# Allegro board TIMERASPIRAPOLVERE.brd
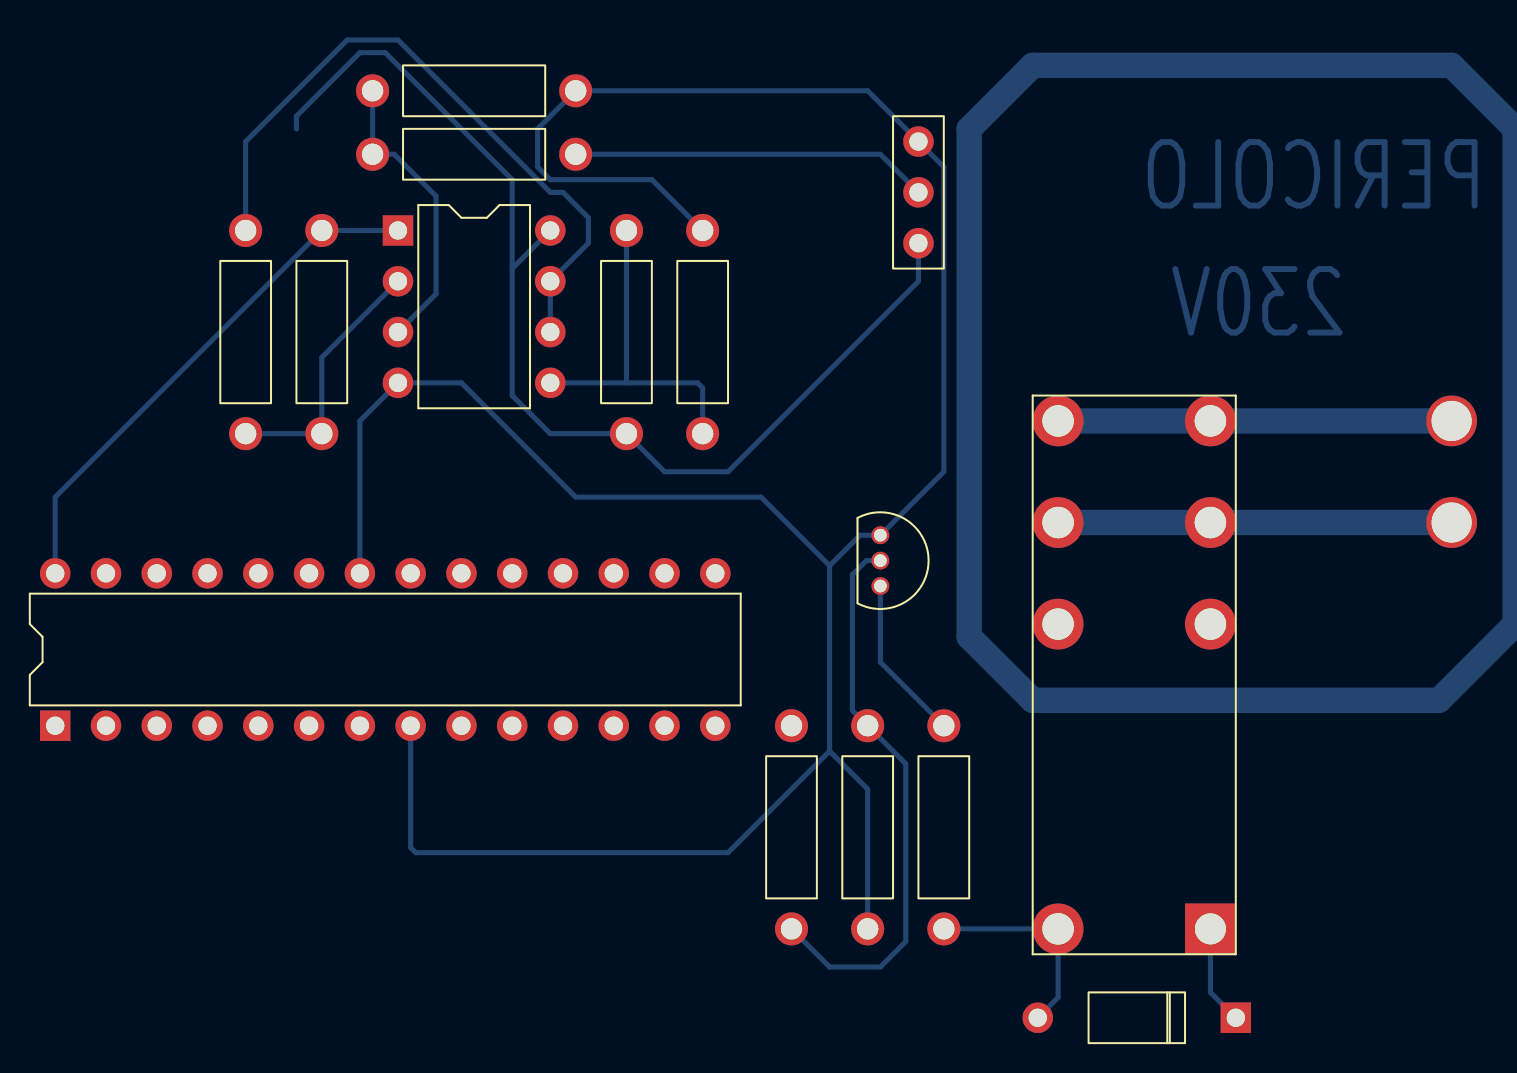
[diagram p0: board, top side]
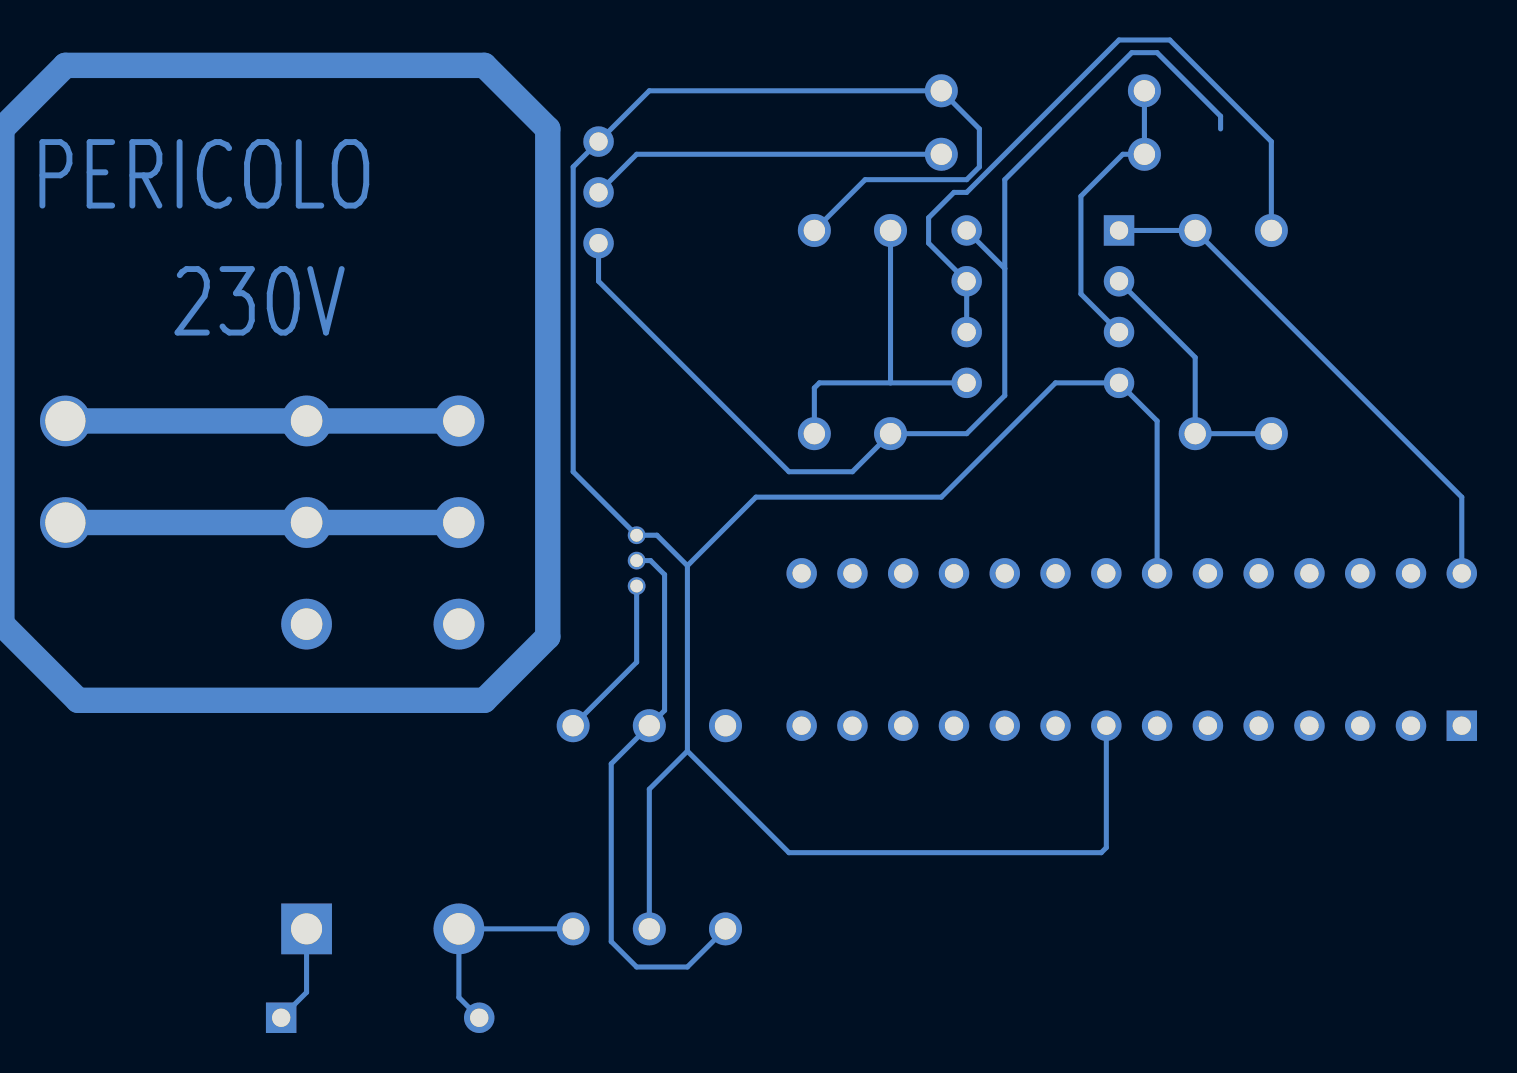
[diagram p1: board, bottom side, seen from below]

No outline. copper layers: TOP, BOTTOM. Coordinates in mm from the lowest, leftmost part position.

## Design rules (mm)
nets with their own width: min track width 1.27; nets N03801 N03830

## Placement (name value [footprint] x y rotation side)
D1  1N4148  [DO41]  59.06 0 90 top
J1  -  [ACS712]  43.18 38.73 270 top
J2  USCITA  [HEADER2]  69.85 24.77 90 top
K1  RELAY DPDT  [RELAY_DPDT]  57.79 4.45 180 top
Q1  2N2222  [TO92]  41.28 24.13 0 top
R1  1k  [RES400]  26.04 43.18 90 top
R2  47k  [RES400]  26.04 46.35 90 top
R3  1k  [RES400]  9.53 29.21 0 top
R4  47k  [RES400]  13.34 29.21 0 top
R5  1k  [RES400]  28.58 29.21 0 top
R6  1k  [RES400]  32.39 29.21 0 top
R7  RESISTOR  [RES400]  44.45 4.45 0 top
R8  220  [RES400]  36.83 14.61 180 top
R9  10k  [RES400]  40.64 4.45 0 top
U1  LM358  [DIP8_3]  17.15 39.37 0 top
U2  ATMega328P  [DIP28_3]  0 14.61 90 top

## Library data of the parts
D1 = DIODE
J1 = CON3: User Part Number: ***
J2 = CON2_0
K1 = RELAY DPDT
Q1 = 2N2222
R1-R9 = RESISTOR: Tolerance: ***; User Part Number: ***
U1 = LM358: Tolerance: ***; User Part Number: ***
U2 = ATMega328 DIP_0: Tolerance: ***; User Part Number: ***

## Footprints (pads in the part's own frame, mm; a bottom-side part is the same pattern mirrored in y, then rotated)
ACS712
  round 1.524 hole 0.914: 1(0,0) 2(-2.54,0) 3(-5.08,0)
DIP8_3
  rect 1.524x1.524 hole 0.914: 1(0,0)
  round 1.524 hole 0.914: 2(0,-2.54) 3(0,-5.08) 4(0,-7.62) 5(7.62,-7.62) 6(7.62,-5.08) 7(7.62,-2.54) 8(7.62,0)
DIP28_3
  rect 1.524x1.524 hole 0.914: 1(0,0)
  round 1.524 hole 0.914: 2(0,-2.54) 3(0,-5.08) 4(0,-7.62) 5(0,-10.16) 6(0,-12.7) 7(0,-15.24) 8(0,-17.78) 9(0,-20.32) 10(0,-22.86) 11(0,-25.4) 12(0,-27.94) 13(0,-30.48) 14(0,-33.02) 15(7.62,-33.02) 16(7.62,-30.48) 17(7.62,-27.94) 18(7.62,-25.4) 19(7.62,-22.86) 20(7.62,-20.32) 21(7.62,-17.78) 22(7.62,-15.24) 23(7.62,-12.7) 24(7.62,-10.16) 25(7.62,-7.62) 26(7.62,-5.08) 27(7.62,-2.54) 28(7.62,0)
DO41
  rect 1.524x1.524 hole 0.914: 1(0,0)
  round 1.524 hole 0.914: 2(0,9.906)
HEADER2
  round 2.54 hole 2.007: 1(0,0) 2(5.08,0)
RELAY_DPDT
  rect 2.54x2.54 hole 1.549: 1(0,0)
  round 2.54 hole 1.575: 2(7.62,0) 3(0,-20.32) 4(0,-15.24) 5(0,-25.4) 6(7.62,-20.32) 7(7.62,-25.4) 8(7.62,-15.24)
RES400
  round 1.651 hole 1.067: 1(0,0) 2(0,10.16)
TO92
  round 0.889 hole 0.635: 1(0,0) 2(0,-1.27) 3(0,-2.54)

## Nets
+5V: J1.1 R5.1 U1.8(VCC) U2.7(VCC) U2.20(AVCC)
+12V: D1.1(K) K1.1(COIL1)
GND: J1.3 Q1.1(EMITTER) R2.1 R6.2 R9.1 U1.4(GND) U2.8(GND) U2.22(GND2)
N00435: R4.2 U1.1(OUT) U2.28(A5)
N00766: U2.9(OSC1)
N00770: U2.10(OSC2)
N01705: R3.1 R4.1 U1.2(-IN)
N02037: R1.2 R2.2 U1.3(+IN)
N02168: J1.2 R1.1
N02488: R3.2 U1.6(-IN) U1.7(OUT)
N02605: R5.2 R6.1 U1.5(+IN)
N03801: J2.1 K1.3(COMMON1) K1.6(COMMON2)
N03830: J2.2 K1.5(NO1) K1.7(NO2)
N04197: D1.2(A) K1.2(COIL2) R7.1
N04335: Q1.3(COLLECTOR) R7.2
N08803: Q1.2(BASE) R8.2 R9.2
N10140: R8.1 U2.17(D11 PWM)

Pads without a net: K1 4 8; U2 1 2 3 4 5 6 11 12 13 14 15 16 18 19 21 23 24 25 26 27

## Routing (per net, layer and track width the routed paths; a pad name or vN(x,y) marks a point on that pad's centre or on a via; arc(x,y) is an arc through that point)
+5V: length 56.6
  BOTTOM w0.254: J1.1 43.18,36.83 33.66,27.31 30.48,27.31 R5.1 24.77,29.21 22.86,31.12 22.86,37.47 ; 22.86,37.47 22.86,41.91 16.51,48.26 15.24,48.26 12.07,45.09 12.07,44.45 ; 22.86,37.47 U1.8
+12V: length 5
  BOTTOM w0.254: K1.1 57.79,1.27 D1.1
GND: length 141
  BOTTOM w0.254: U2.22 15.24,29.84 U1.4 20.32,31.75 26.04,26.03 35.31,26.03 38.74,22.61 ; R6.2 29.85,41.91 24.77,41.91 24.13,42.54 24.13,44.45 R2.1 40.64,46.35 J1.3 44.45,42.54 44.45,27.31 Q1.1 40.26,24.13 38.74,22.61 ; 38.74,13.34 40.64,11.43 R9.1 ; 38.74,13.34 33.66,8.26 18.03,8.26 17.78,8.51 U2.8 ; 38.74,13.34 38.74,22.61
N00435: length 26.5
  BOTTOM w0.254: U2.28 0,26.03 R4.2 U1.1
N01705: length 13
  BOTTOM w0.254: U1.2 13.34,33.02 R4.1 R3.1
N02037: length 14.8
  BOTTOM w0.254: 17.15,34.29 19.05,36.2 19.05,41.08 16.95,43.18 R1.2 R2.2
N02168: length 17.9
  BOTTOM w0.254: J1.2 41.28,43.18 R1.1
N02488: length 33.9
  BOTTOM w0.254: R3.2 9.53,43.81 14.61,48.9 17.15,48.9 24.77,41.28 25.4,41.28 26.67,40.01 26.67,38.73 U1.7 24.77,34.29
N02605: length 17.6
  BOTTOM w0.254: 28.58,31.75 32.13,31.75 32.39,31.5 R6.1 ; 28.58,31.75 U1.5 ; 28.58,31.75 R5.2
N03801: length 19.7
  BOTTOM w1.27: K1.6 K1.3 J2.1
N03830: length 19.7
  BOTTOM w1.27: K1.7 K1.5 J2.2
N04197: length 10.6
  BOTTOM w0.254: D1.2 50.17,1.02 K1.2 R7.1
N04335: length 8.3
  BOTTOM w0.254: R7.2 41.28,17.78 Q1.3
N08803: length 28.2
  BOTTOM w0.254: 41.28,22.86 40.58,22.86 39.88,22.16 39.88,15.37 R9.2 42.55,12.7 42.55,3.81 41.28,2.54 38.74,2.54 R8.2

## Text on the board
BOTTOM: 230V | PERICOLO
